# EAGLE board PowerModule (EAGLE 7.2.0)
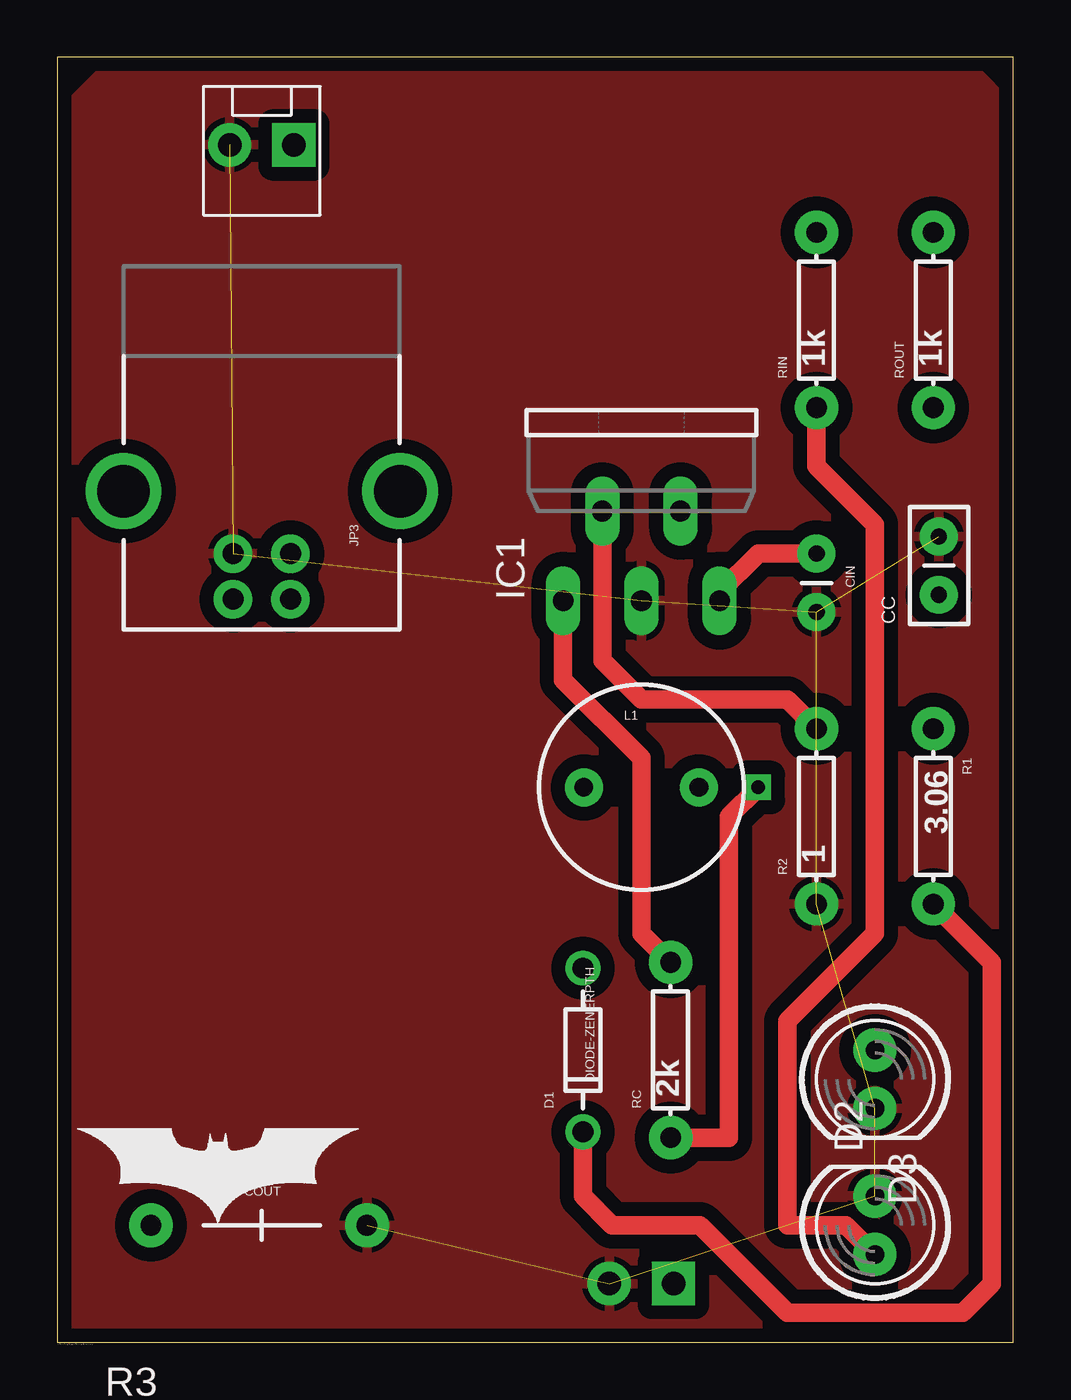
[diagram p0: board, top side]
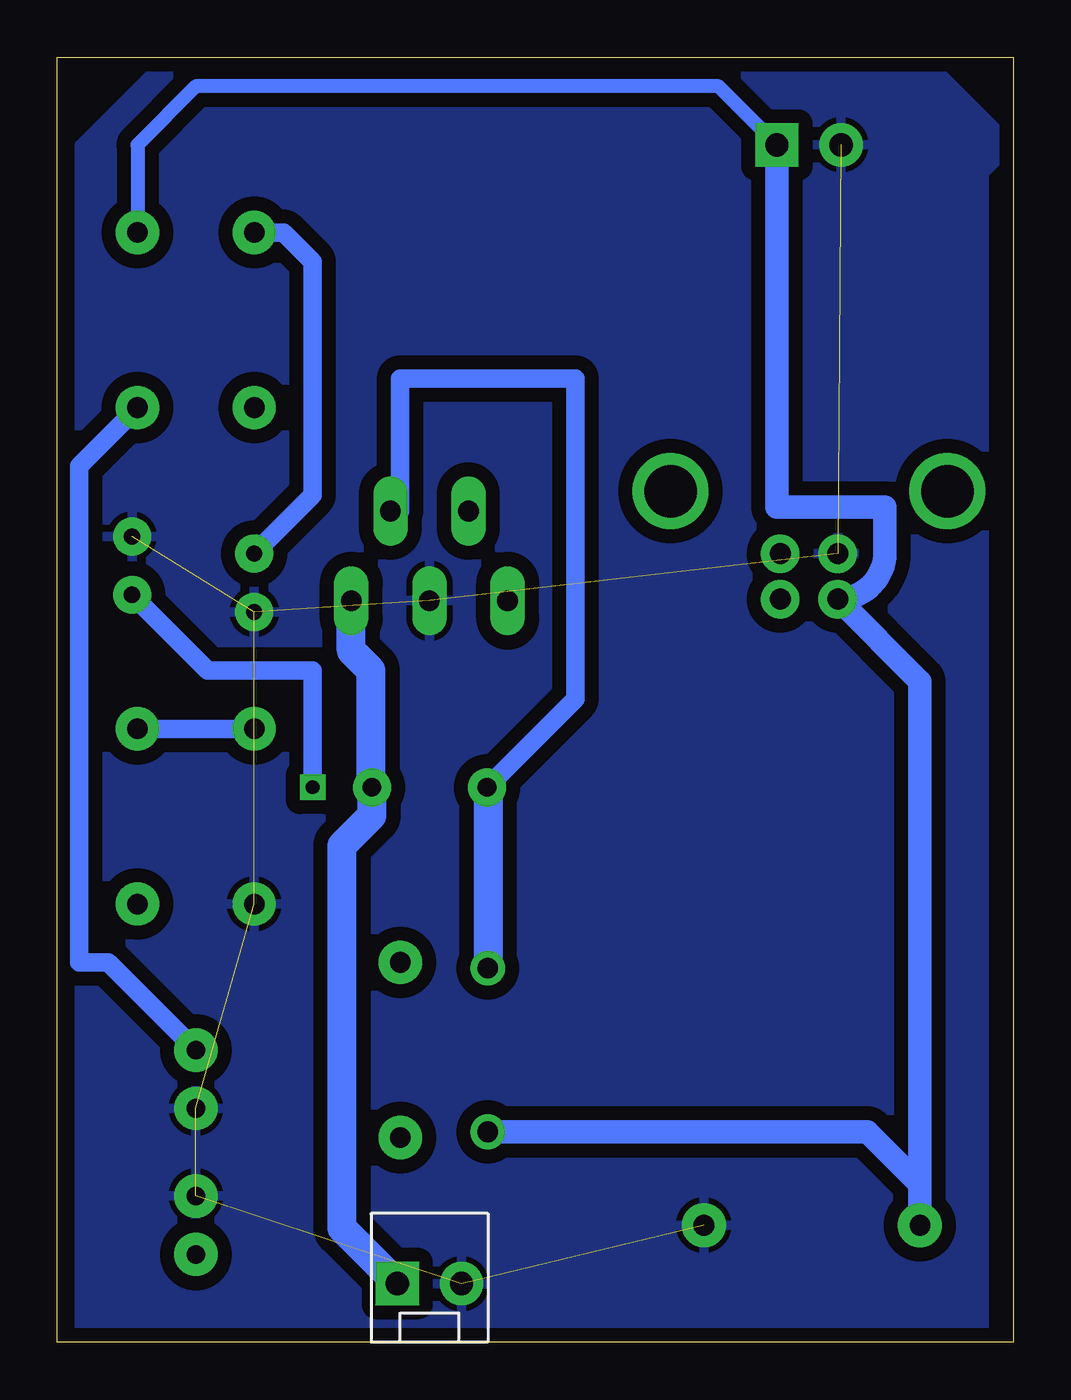
[diagram p1: board, bottom side, seen from below]

Size 41.58 x 55.87 mm. Coordinates in mm from the lower left corner, seen from the top.
Outline: 0,0 41.58,0 41.58,55.87 0,55.87 0,0
Copper layers (1*16): Top 0.035mm / dielectric 1.5mm / Bottom 0.035mm
Design rules "SparkFun": minimum track width 8mil, minimum drill 20mil, track to track 8mil, track to pad 8mil, pad to pad 8mil, via to via 8mil, smd to smd 8mil, copper to edge 8mil, drill to drill 8mil, minimum pad ring 12mil, minimum via ring 10mil, stop-mask expansion 4mil, vias tented up to drill 20mil, thermal gap 10mil

## Footprints (pad centres in the part's own frame; a part is rotated, then mirrored left to right if it is on the bottom)
12BH412 = drill 1 pad 2.54: + 22.5,0; - -22.5,0
CAP-PTH-SMALLEZ = drill 0.7 pad 1.651: 1 0,0; 2 2.54,0
CAP-PTH-SMALL = drill 0.7 pad 1.651: 1 0,0; 2 2.54,0
CAP-PTH-LARGE = drill 0.9 pad 1.905: 1 -4.826,0; 2 4.572,0
DIODE-ZENER = drill 0.9: P$1 -3.556,0; P$2 3.556,0
LED5MM-KIT = drill 0.813 pad 1.88: A -1.27,0; K 1.27,0
TO220-5 = drill 0.9 long: 1 -3.4,-8.4; 2 -1.7,-4.5; 3 0,-8.4; 4 1.7,-4.5; 5 3.4,-8.4
MOLEX-1X2_LOCK = drill 1.016 pad 1.88 square: 1 -0.127,0 | drill 1.016 pad 1.88: 2 2.667,0
USB-B-PTH = drill 0.914 pad 1.676: D+ 0,1.25; D- 1.981,1.25; GND 0,-1.25; VBUS 1.981,-1.25 | drill 2.286: S1 -2.718,-6.02; S2 -2.718,6.02
RLB0912 = drill 0.813 pad 1.651: 1 2.502,0; 2 -2.502,0
AXIAL-0.3EZ = drill 0.9 pad 1.88: P$1 -3.81,0; P$2 3.81,0
0207/9 = drill 0.813 pad 1.676 octagon: 1 -4.572,0; 2 4.572,0

## Placement (x,y rotation side)
BATTERY  4.1V ~ 3.7V  [12BH412]  23.37,-14.1 0 top  (outside the outline)
CC  0.5uF  [CAP-PTH-SMALLEZ]  38.34,32.5 90 top
CIN  0.1uF  [CAP-PTH-SMALL]  33.02,34.29 270 top
COUT  4700uF  [CAP-PTH-LARGE]  8.89,5.08 0 top
D1  DIODE-ZENERPTH  [DIODE-ZENER]  22.86,12.7 90 top
D2  [LED5MM-KIT]  35.56,5.08 90 top
D3  [LED5MM-KIT]  35.56,11.43 270 top
IC1  LM2577T  [TO220-5]  25.4,40.64 0 top
INPUT  [MOLEX-1X2_LOCK]  26.67,2.54 0 bottom
JP3  USB-B  [USB-B-PTH]  8.89,34.29 270 top
L1  47uH  [RLB0912]  25.4,24.13 0 top
OUTPUT  [MOLEX-1X2_LOCK]  10.16,52.07 180 top
R1  3.06  [AXIAL-0.3EZ]  38.1,22.86 270 top
R2  1  [AXIAL-0.3EZ]  33.02,22.86 90 top
R3  1K  [0207/9]  5.11,-3.86 0 top  (outside the outline)
R4  2K  [0207/9]  5.11,-8.31 0 top  (outside the outline)
RC  2k  [AXIAL-0.3EZ]  26.67,12.7 90 top
RIN  1k  [AXIAL-0.3EZ]  33.02,44.45 90 top
ROUT  1k  [AXIAL-0.3EZ]  38.1,44.45 90 top

## Library data of the parts
BATTERY R3 R4 = adafruit
CC CIN COUT = SparkFun-Capacitors
D1 = SparkFun-DiscreteSemi
D2 D3 = SparkFun-LED
IC1 = lm2577
INPUT OUTPUT = SparkFun-Connectors
JP3 = SparkFun-Connectors; PROD_ID: CONN-08278
L1 = SparkFun-Passives
R1 R2 RC RIN ROUT = SparkFun-Resistors

## Nets
COMP: IC1.1 RC.P$2
FB: IC1.2 R1.P$1 R2.P$2
GND: CC.2 CIN.2 COUT.2 D2.K D3.K IC1.3 INPUT.2 JP3.GND OUTPUT.2 R2.P$1
GND-ISO: BATTERY.+ R4.1
N$1: CC.1 RC.P$1
N$2: D2.A RIN.P$1
N$3: D3.A ROUT.P$1
N$4: BATTERY.- R3.2
SWITCH: D1.P$2 IC1.4 L1.2
TO-ADC: R3.1 R4.2
VIN: CIN.1 IC1.5 INPUT.1 L1.1 RIN.P$2
VOUT: COUT.1 D1.P$1 JP3.VBUS OUTPUT.1 R1.P$2 ROUT.P$2

## Tracks (layer width: path | path; a pad name or v marks a point on that pad's centre or on a via)
COMP
  Top 0.813: IC1.1 22,28.8 25.4,25.4 25.4,17.78 RC.P$2
FB
  Top 0.813: IC1.2 23.7,29.64 25.4,27.94 31.75,27.94 R2.P$2
  Bottom 0.813: R2.P$2 R1.P$1
GND  (9 unrouted)
  pour Top (isolate 0.61): 0,53.34 2.54,55.88 39.37,55.88 41.91,53.34 41.91,2.54 39.37,0 0,0
  pour Bottom (isolate 0.61): 0,52.07 3.81,55.88 36.83,55.88 40.64,52.07 40.64,0 1.27,0 1.27,50.8
GND-ISO  (1 unrouted)
N$1  (via drill 0.6)
  Top 0.813: RC.P$1 29.21,8.89 29.21,22.86 v30.48,24.13
  Bottom 0.813: v30.48,24.13 30.48,29.21 35.05,29.21 CC.1
N$2
  Top 0.813: RIN.P$1 33.02,38.1 35.56,35.56 35.56,17.78 31.75,13.97 31.75,5.08 34.29,5.08 D2.A
N$3
  Bottom 0.813: ROUT.P$1 40.64,38.1 40.64,16.51 39.37,16.51 D3.A
N$4  (1 unrouted)
SWITCH
  Bottom 0.813: L1.2 19.05,27.98 19.05,41.91 26.67,41.91 26.67,36.14 IC1.4
  Bottom 1.27: L1.2 22.86,24.13 D1.P$2
TO-ADC  (1 unrouted)
VIN
  Top 0.813: IC1.5 28.8,32.61 30.48,34.29 CIN.1
  Bottom 0.813: RIN.P$2 31.75,48.26 30.48,46.99 30.48,36.83 CIN.1
  Bottom 1.27: INPUT.1 29.21,4.95 29.21,21.59 27.9,22.9 L1.1 27.94,24.17 27.94,29.21 28.8,30.07 IC1.5
VOUT
  Top 0.813: D1.P$1 22.86,6.35 24.13,5.08 27.94,5.08 31.75,1.27 39.37,1.27 40.64,2.54 40.64,16.51 R1.P$2
  Bottom 0.61: OUTPUT.1 12.83,54.61 35.56,54.61 38.1,52.07 ROUT.P$2
  Bottom 1.016: OUTPUT.1 10.29,36.32 5.59,36.32 5.59,34.36 arc90 JP3.VBUS 4.06,28.73 COUT.1 4.06,6.86 6.35,9.14 D1.P$1

## Text on the board
tPlace: C:/Users/f-ing-flappy-b/Desktop/Batman.bmp